# Altium PCB PCB1.PcbDoc (part 2 of 2)
Units mm, origin at the board's own origin, x right, y up, seen from the top; angles counter-clockwise.
Board outline 42.3 x 53.8 mm, 2 copper layers (Top Layer, Bottom Layer), stack 1.571 mm thick; 73 components, 29 nets, 129 pads, 33 vias.
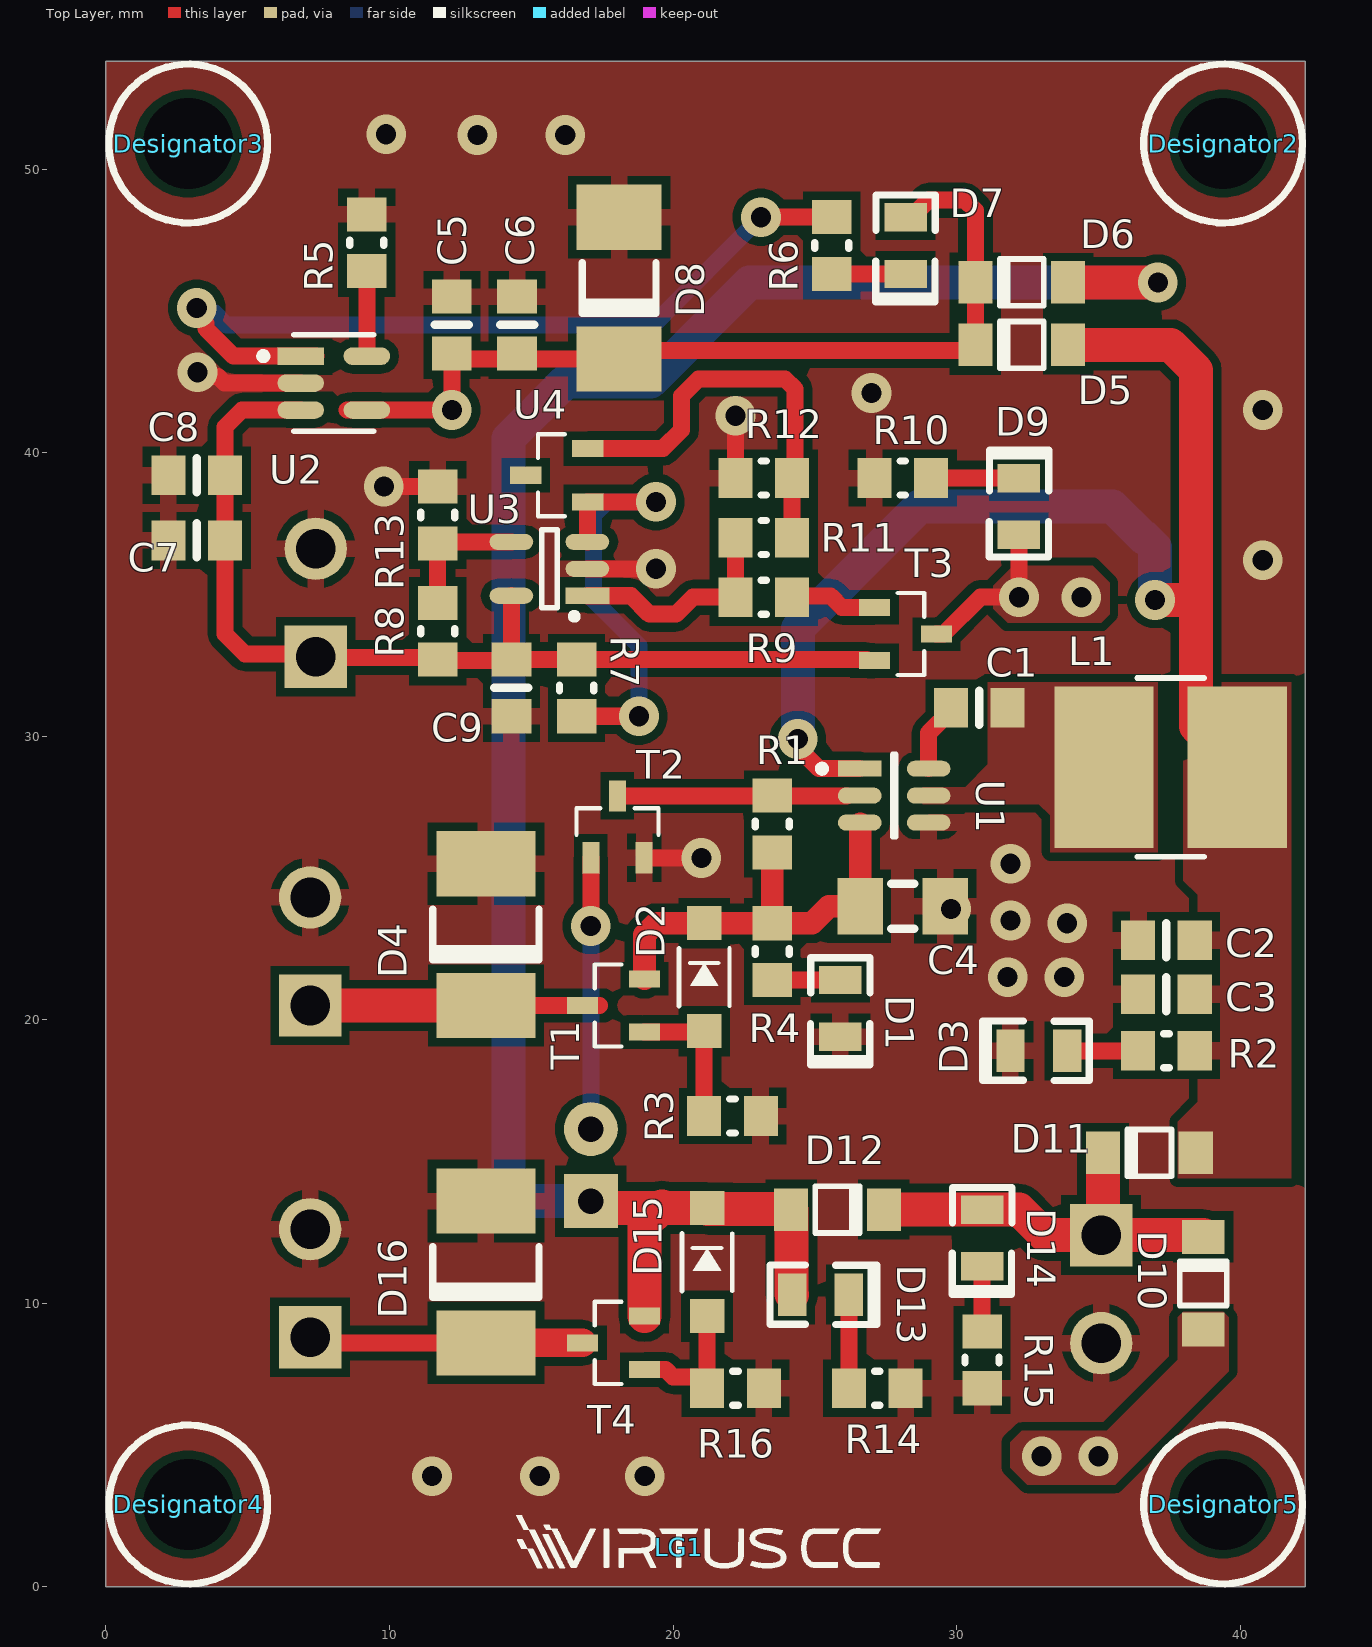
[diagram p0: Top Layer view]

## Part data (continued)
R11: "RES 270K OHM 1% 1/8W 0805", Case Code (Imperial)=0805, Case Code (Metric)=2012, Manufacturer=Yageo, Max Operating Temperature=155°C, Max Power Dissipation=125mW, Min Operating Temperature=-55°C, Package Quantity=1, Resistance Tolerance=1%, Resistor Type="Thick Film", Supplier Part Number=311-270KCRCT-ND, Temperature Coefficient=100ppm/°C, Voltage Rating=150V, Case/Package=0805, Category="Chip SMD Resistors", ComponentLink1Description=https://datasheet.ciiva.com/11819/0900766b8106beab-11819833.pdf?src-supplier=Rs, ComponentLink1URL=https://datasheet.ciiva.com/11819/0900766b8106beab-11819833.pdf?src-supplier=Rs, ComponentLink2Description=https://datasheet.ciiva.com/2457/pyu-r-int-thick-7-2457227.pdf?src-supplier=Digikey, ComponentLink2URL=https://datasheet.ciiva.com/2457/pyu-r-int-thick-7-2457227.pdf?src-supplier=Digikey, ComponentLink3Description=https://datasheet.ciiva.com/2457/pyu-r-int-thick-7-2457228.pdf?src-supplier=Digikey, ComponentLink3URL=https://datasheet.ciiva.com/2457/pyu-r-int-thick-7-2457228.pdf?src-supplier=Digikey, ComponentLink4Description=https://datasheet.ciiva.com/2457/pyu-r-int-thick-7-2457229.pdf?src-supplier=Digikey, ComponentLink4URL=https://datasheet.ciiva.com/2457/pyu-r-int-thick-7-2457229.pdf?src-supplier=Digikey, ComponentLink5Description=https://datasheet.ciiva.com/5558/rc0805-5558095.pdf?src-supplier=Mouser, ComponentLink5URL=https://datasheet.ciiva.com/5558/rc0805-5558095.pdf?src-supplier=Mouser, Depth=1.25mm, Features="Moisture Resistant", Height=0.024inch, Lead Free="Lead Free", Length=0.079inch, Manufacturer Part Number=RC0805FR-07270KL, Number of Terminations=2, Packaging="Cut Tape", Power Rating=125mW, Pricing="1=0,1, 10=0,025, 50=0,016, 100=0,0133, 500=0,00912, 1000=0,00787 (USD)", Reach SVHC Compliant=Unknown, RoHS=Yes, RoHS Compliant=Yes, Series=RC, Stock=171412, Supplier=Digikey, Supplier 1=Digikey, Supplier 2=Mouser, Supplier Part Number 1=311-270KCRCT-ND, Supplier Part Number 2=603-RC0805FR-07270KL, Technology="THICK FILM", Termination=SMD/SMT, Tolerance=1%, Voltage Rating (AC)=150V, Width=0.049inch, Working Voltage=150V
R12: "RES 16K OHM 1% 1/8W 0805", Case Code (Imperial)=0805, Case Code (Metric)=2012, Manufacturer=Yageo, Max Operating Temperature=155°C, Max Power Dissipation=125mW, Min Operating Temperature=-55°C, Package Quantity=1, Supplier Part Number=311-16.0KCRCT-ND, Temperature Coefficient=100ppm/°C, Tolerance=1%, Voltage Rating=150V, Case/Package=0805, Category="Chip SMD Resistors", ComponentLink1Description=https://datasheet.ciiva.com/2457/pyu-r-int-thick-7-2457554.pdf?src-supplier=Digikey, ComponentLink1URL=https://datasheet.ciiva.com/2457/pyu-r-int-thick-7-2457554.pdf?src-supplier=Digikey, ComponentLink2Description=https://datasheet.ciiva.com/2457/pyu-r-int-thick-7-2457555.pdf?src-supplier=Digikey, ComponentLink2URL=https://datasheet.ciiva.com/2457/pyu-r-int-thick-7-2457555.pdf?src-supplier=Digikey, ComponentLink3Description=https://datasheet.ciiva.com/2457/pyu-r-int-thick-7-2457556.pdf?src-supplier=Digikey, ComponentLink3URL=https://datasheet.ciiva.com/2457/pyu-r-int-thick-7-2457556.pdf?src-supplier=Digikey, ComponentLink4Description=https://datasheet.ciiva.com/16744/rc0805-16744799.pdf?src-supplier=Future+Electronics, ComponentLink4URL=https://datasheet.ciiva.com/16744/rc0805-16744799.pdf?src-supplier=Future+Electronics, ComponentLink5Description=https://datasheet.ciiva.com/15189/getdatasheetpartid-327975-15189909.pdf?src-supplier=Verical, ComponentLink5URL=https://datasheet.ciiva.com/15189/getdatasheetpartid-327975-15189909.pdf?src-supplier=Verical, Construction=Rectangular, Depth=1.25mm, Features="Moisture Resistant", Height=0.024inch, Lead Free="Lead Free", Length=0.079inch, Manufacturer Part Number=RC0805FR-0716KL, Military Standard=Not, Number of Terminations=2, Packaging="Tape and Reel", Power Rating=125mW, Pricing="1=0,1, 10=0,026, 50=0,0162, 100=0,0136, 500=0,00932, 1000=0,00805 (USD)", RoHS=Yes, RoHS Compliant=Yes, Series=RC, Stock=164068, Supplier=Digikey, Supplier 1=Digikey, Supplier 2=Mouser, Supplier Part Number 1=311-16.0KCRCT-ND, Supplier Part Number 2=603-RC0805FR-0716KL, Termination=SMD/SMT, Voltage Rating (DC)=150V, Width=0.049inch
R13: "RES 330K OHM 1% 1/8W 0805", Case Code (Imperial)=0805, Case Code (Metric)=2012, Manufacturer=Yageo, Max Operating Temperature=155°C, Min Operating Temperature=-55°C, Power Rating=125mW, Supplier Part Number=13-RC0805FR-13330KLCT-ND, Temperature Coefficient=100ppm/°C, Tolerance=1%, Voltage Rating=150V, Case/Package=0805, Category="Chip SMD Resistors", ComponentLink1Description=http://www.mouser.com/ds/2/447/Yageo_08112016_RC0805-968729.pdf?src-supplier=Mouser, ComponentLink1URL=http://www.mouser.com/ds/2/447/Yageo_08112016_RC0805-968729.pdf?src-supplier=Mouser, ComponentLink2Description=http://www.yageo.com/documents/recent/PYu-RC_Group_51_RoHS_L_2.pdf?src-supplier=Avnet, ComponentLink2URL=http://www.yageo.com/documents/recent/PYu-RC_Group_51_RoHS_L_2.pdf?src-supplier=Avnet, ComponentLink3Description=https://datasheet.octopart.com/RC0805FR-13330KL-Yageo-datasheet-164759695.pdf?src-supplier=Future+Electronics, ComponentLink3URL=https://datasheet.octopart.com/RC0805FR-13330KL-Yageo-datasheet-164759695.pdf?src-supplier=Future+Electronics, Contact Plating=Tin,Matte, Height=0.5mm, Length=2mm, Manufacturer Part Number=RC0805FR-13330KL, Packaging="Tape and Reel", Pricing="1=0,1, 10=0,025, 50=0,016, 100=0,0133, 500=0,00912, 1000=0,00787, 5000=0,00577, 10000=0,00511 (USD)", RoHS=Yes, RoHS Compliant=Yes, Series=RC, Stock=27015, Supplier=Digikey, Supplier 1=Digikey, Supplier 2=Mouser, Supplier Part Number 1=13-RC0805FR-13330KLCT-ND, Supplier Part Number 2=603-RC0805FR-13330KL, Termination=SMD/SMT, Width=1.25mm
STF1 STF2 STF3 STF4: "HEX STANDOFF M3x0.5 BRASS 15MM"
T1 T4: "MOSFET P-CH 40V 2.4A SOT23", Case/Package=SOT-23, Continuous Drain Current (ID)=2.4A, Drain to Source Breakdown Voltage=-40V, Drain to Source Resistance=64mR, Drain to Source Voltage (Vdss)=40V, Gate to Source Voltage (Vgs)=20V, Input Capacitance=587pF, Manufacturer=Diodes, Max Operating Temperature=150°C, Max Power Dissipation=720mW, Min Operating Temperature=-55°C, Supplier Part Number=DMP4065S-7DICT-ND, Category=MOSFETs, ComponentLink1Description=http://www.farnell.com/datasheets/2649034.pdf?src-supplier=Farnell, ComponentLink1URL=http://www.farnell.com/datasheets/2649034.pdf?src-supplier=Farnell, ComponentLink2Description=http://www.mouser.com/ds/2/115/DMP4065S-537770.pdf?src-supplier=Mouser, ComponentLink2URL=http://www.mouser.com/ds/2/115/DMP4065S-537770.pdf?src-supplier=Mouser, ComponentLink3Description=https://www.diodes.com/assets/Datasheets/DMP4065S.pdf?src-supplier=Digikey, ComponentLink3URL=https://www.diodes.com/assets/Datasheets/DMP4065S.pdf?src-supplier=Digikey, ComponentLink4Description=http://diodes.com/datasheets/DMP4065S.pdf?src-supplier=Avnet, ComponentLink4URL=http://diodes.com/datasheets/DMP4065S.pdf?src-supplier=Avnet, ComponentLink5Description=http://www.farnell.com/datasheets/2649034.pdf?src-supplier=Newark, ComponentLink5URL=http://www.farnell.com/datasheets/2649034.pdf?src-supplier=Newark, ComponentLink6Description=http://www.farnell.com/datasheets/2649034.pdf?src-supplier=Element14, ComponentLink6URL=http://www.farnell.com/datasheets/2649034.pdf?src-supplier=Element14, ComponentLink7Description=https://datasheet.octopart.com/DMP4065S-7-Diodes-Inc.-datasheet-129886328.pdf?src-supplier=TME, ComponentLink7URL=https://datasheet.octopart.com/DMP4065S-7-Diodes-Inc.-datasheet-129886328.pdf?src-supplier=TME, Height=1.1mm, Manufacturer Part Number=DMP4065S-7, Mounting Technology="Surface Mount", Number of Channels=1, Packaging="Cut Tape", Pins=3, Power Dissipation=720mW, Pricing="1=0,43, 10=0,302, 100=0,1523, 500=0,135, 1000=0,10506 (USD)", Rds On Max=80mR, RoHS=Yes, RoHS Compliant=Yes, Series=-, Stock=25010, Supplier=Digikey, Supplier 1=Digikey, Supplier 2=Mouser, Supplier Part Number 1=DMP4065S-7DICT-ND, Supplier Part Number 2=621-DMP4065S-7, Turn-Off Delay Time=36.3ns, Turn-On Delay Time=3.6ns
T2: "TRANS PREBIAS NPN 200MW SOT23-3", Case/Package=SOT-23-3, Collector Emitter Breakdown Voltage=50V, Collector-emitter Voltage-Max=300mV, Continuous Collector Current=100mA, Emitter Base Voltage (VEBO)=30V, JLCPCB Part=C508183, Manufacturer=Diodes, Max Operating Temperature=150°C, Max Power Dissipation=200mW, Min Operating Temperature=-55°C, Package Quantity=3000, Supplier Part Number 1=DDTC143ZCA-FDICT-ND, Transition Frequency=250MHz, Category=BJTs, Collector Emitter Voltage (VCEO)=50V, ComponentLink1Description=http://www.mouser.com/ds/2/115/ds30330-71322.pdf?src-supplier=Mouser, ComponentLink1URL=http://www.mouser.com/ds/2/115/ds30330-71322.pdf?src-supplier=Mouser, ComponentLink2Description=http://www.alliedelec.com/m/d/be0b5f6f3c5081911d08f51c92d34358.pdf?src-supplier=Allied+Electronics, ComponentLink2URL=http://www.alliedelec.com/m/d/be0b5f6f3c5081911d08f51c92d34358.pdf?src-supplier=Allied+Electronics, ComponentLink3Description=http://uk.rs-online.com/webdocs/1321/0900766b81321d3c.pdf?src-supplier=RSComponents, ComponentLink3URL=http://uk.rs-online.com/webdocs/1321/0900766b81321d3c.pdf?src-supplier=RSComponents, ComponentLink4Description=http://components.arrow.com/part/dataview/41508542S9348013N2867?src-supplier=Arrow+Electronics, ComponentLink4URL=http://components.arrow.com/part/dataview/41508542S9348013N2867?src-supplier=Arrow+Electronics, ComponentLink5Description=http://www.diodes.com//datasheets/ds30330.pdf?src-supplier=Avnet, ComponentLink5URL=http://www.diodes.com//datasheets/ds30330.pdf?src-supplier=Avnet, ComponentLink6Description=http://www.diodes.com/_files/datasheets/ds30330.pdf?src-supplier=Future+Electronics, ComponentLink6URL=http://www.diodes.com/_files/datasheets/ds30330.pdf?src-supplier=Future+Electronics, ComponentLink7Description=https://www.diodes.com/assets/Datasheets/ds30330.pdf?src-supplier=Digi-Key, ComponentLink7URL=https://www.diodes.com/assets/Datasheets/ds30330.pdf?src-supplier=Digi-Key, Current Rating=100mA, Element Configuration=Single, Height=1mm, hFE Min=80, Lead Free="Lead Free", Length=3.05mm, Manufacturer Part Number=DDTC143ZCA-7-F, Max Breakdown Voltage=50V, Max Collector Current=100mA, Max Output Current=100mA, Mount="Surface Mount", Number of Pins=3, Operating Supply Voltage=50V, Packaging="Tape and Reel", Polarity=NPN, Pricing 1="1=0,20000, 10=0,18400, 100=0,10000, 500=0,06156, 1000=0,04198 (USD)", Radiation Hardening=No, RoHS=Yes, RoHS Compliant=Yes, Series=-, Stock 1=1278422, Supplier 1=Digi-Key, Supplier 2=Mouser, Supplier 3="Arrow Electronics", Supplier 4=Digi-Key, Supplier 5=Mouser, Supplier 6=Digi-Key, Supplier 7=Mouser, Supplier Part Number 2=621-DDTC143ZCA-F, Supplier Part Number 3=DDTC143ZCA-7-F, Supplier Part Number 4=1727-3045-1-ND, Supplier Part Number 5=771-PDTC143ZT-/T3, Supplier Part Number 6=MUN2233T1GOSCT-ND, Supplier Part Number 7=863-MUN2233T1G, Voltage Rating (DC)=50V, Weight=0.000282oz, Width=1.4mm
T3: "MOSFET P-CHANNEL 20V 4A SOT23", JLCPCB Part=C391636, Manufacturer="Pan Jit", Supplier Part Number 1=3757-PJA3415_R1_00001CT-ND, Manufacturer Part Number=PJA3415_R1_00001, Pricing 1="1=0,40000, 10=0,30100, 100=0,17040, 500=0,11286, 1000=0,08653 (USD)", RoHS=Yes, RoHS Compliant=Yes, Stock 1=8995, Supplier 1=Digikey, Supplier 2=Mouser, Supplier Part Number 2=241-PJA3415_R1_00001
U1: "IC REG BUCK 5V 2A TSOT23-6", Manufacturer=Diodes, Max Operating Temperature=85°C, Max Supply Voltage=32V, Min Operating Temperature=-40°C, Min Supply Voltage=3.8V, Nominal Supply Current=22uA, Output Current=2A, Output Voltage=5V, Supplier Part Number=AP63205WU-7DICT-ND, Switching Frequency=1.1MHz, Category="Voltage Regulators - Switching", ComponentLink1Description=https://www.diodes.com/assets/Datasheets/AP63200-AP63201-AP63203-AP63205.pdf?src-supplier=Digikey, ComponentLink1URL=https://www.diodes.com/assets/Datasheets/AP63200-AP63201-AP63203-AP63205.pdf?src-supplier=Digikey, Height=1mm, Manufacturer Part Number=AP63205WU-7, Max Duty Cycle=100%, Number of Outputs=1, Pricing="1=0,71, 10=0,506, 25=0,4548, 100=0,398, 250=0,37088, 500=0,35456, 1000=0,34112 (USD)", RoHS=Yes, Stock=22325, Supplier=Digikey, Supplier 1=Digikey, Supplier 2=Mouser, Supplier Part Number 1=AP63205WU-7DICT-ND, Supplier Part Number 2=621-AP63205WU-7
U2: "IC BATT CNTL LI-ION 1CEL SOT23-5", Battery Pack Voltage=4.2V, Case/Package=SOT-23, Drain to Source Resistance=350mR, Manufacturer=Microchip, Max Charge Current=500mA, Max Operating Temperature=85°C, Max Output Voltage=4.5V, Max Power Dissipation=1.54W, Max Supply Voltage=6V, Min Operating Temperature=-40°C, Min Output Voltage=4.168V, Min Supply Voltage=3.75V, Supplier Part Number=MCP73831T-2ACI/OTCT-ND, Voltage Rating=4.534V, Category="Battery Management", ComponentLink1Description=https://datasheet.ciiva.com/22828/0900766b80d2b53a-22828876.pdf?src-supplier=Rs, ComponentLink1URL=https://datasheet.ciiva.com/22828/0900766b80d2b53a-22828876.pdf?src-supplier=Rs, ComponentLink2Description=https://datasheet.ciiva.com/26344/651521-da-01-en-contr-mcp73831t-2aci-ot-sot-23-5-mcp-26344458.pdf?src-supplier=Conrad, ComponentLink2URL=https://datasheet.ciiva.com/26344/651521-da-01-en-contr-mcp73831t-2aci-ot-sot-23-5-mcp-26344458.pdf?src-supplier=Conrad, ComponentLink3Description=https://datasheet.ciiva.com/1931/21984e-1931953.pdf?src-supplier=Digikey, ComponentLink3URL=https://datasheet.ciiva.com/1931/21984e-1931953.pdf?src-supplier=Digikey, ComponentLink4Description=https://datasheet.ciiva.com/1931/21984e-1931954.pdf?src-supplier=Digikey, ComponentLink4URL=https://datasheet.ciiva.com/1931/21984e-1931954.pdf?src-supplier=Digikey, ComponentLink5Description=https://datasheet.ciiva.com/1931/21984e-1931955.pdf?src-supplier=Digikey, ComponentLink5URL=https://datasheet.ciiva.com/1931/21984e-1931955.pdf?src-supplier=Digikey, ComponentLink6Description=https://datasheet.ciiva.com/3213/21984e-3213404.pdf?src-supplier=Avnet, ComponentLink6URL=https://datasheet.ciiva.com/3213/21984e-3213404.pdf?src-supplier=Avnet, ComponentLink7Description=https://datasheet.ciiva.com/28626/630369-28626439.pdf?src-supplier=Element14, ComponentLink7URL=https://datasheet.ciiva.com/28626/630369-28626439.pdf?src-supplier=Element14, ComponentLink8Description=https://datasheet.ciiva.com/46385/630369-46385324.pdf?src-supplier=Element14, ComponentLink8URL=https://datasheet.ciiva.com/46385/630369-46385324.pdf?src-supplier=Element14, ComponentLink9Description=https://datasheet.ciiva.com/1137/630369-1137803.pdf?src-supplier=Element14, ComponentLink9URL=https://datasheet.ciiva.com/1137/630369-1137803.pdf?src-supplier=Element14, ComponentLink10Description=https://datasheet.ciiva.com/1144/630369-1144461.pdf?src-supplier=Newark, ComponentLink10URL=https://datasheet.ciiva.com/1144/630369-1144461.pdf?src-supplier=Newark, ComponentLink11Description=https://datasheet.ciiva.com/16286/filehandler-aspxddocname-en025112-16286957.pdf?src-supplier=Future+Electronics, ComponentLink11URL=https://datasheet.ciiva.com/16286/filehandler-aspxddocname-en025112-16286957.pdf?src-supplier=Future+Electronics, Fault Protection="Over Voltage", Height=1.3mm, Length=3.1mm, Manufacturer Part Number=MCP73831T-2ACI/OT, Mounting Technology="Surface Mount", Number of Cells=1, Number of Channels=1, Number of Outputs=1, Output Current=500mA, Output Voltage=4.2V, Packaging="Tape and Reel", Pins=5, Pricing="1=0,76, 25=0,63, 100=0,6125 (USD)", Radiation Hardening=No, Reach SVHC Compliant=No, RoHS=Yes, RoHS Compliant=Yes, Series=-, Stock=33781, Supplier=Digikey, Supplier 1=Digikey, Supplier 2=Mouser, Supplier Part Number 1=MCP73831T-2ACI/OTCT-ND, Supplier Part Number 2=579-MCP73831T-2ACIOT, Termination=SMD/SMT, Weight=0.00709oz, Width=1.8mm
U3: "AUTOMOTIVE NANO POWER COMPARATOR", JLCPCB Part=C3658921, Manufacturer="Texas Instruments", Supplier Part Number 1=296-TLV7031QDBVRQ1CT-ND, Manufacturer Part Number=TLV7031QDBVRQ1, Pricing 1="1=0,96000, 10=0,86000, 25=0,81600, 100=0,67040, 250=0,62672, 500=0,55384, 1000=0,48125 (USD)", RoHS=No, RoHS Compliant=Yes, Stock 1=2000, Supplier 1=Digi-Key, Supplier 2=Mouser, Supplier Part Number 2=595-TLV7031QDBVRQ1
U4: "IC VREF SHUNT 1% SOT23-3", Case/Package=TO-236-3, Cathode Current=70uA, Manufacturer=Microchip, Max Operating Temperature=85°C, Min Operating Temperature=-40°C, Min Output Voltage=1.225V, Output Current=12mA, Supplier Part Number 1=576-2572-1-ND, Temperature Coefficient=150ppm/°C, Tolerance=1%, Category="Voltage References", ComponentLink1Description=https://datasheet.ciiva.com/16221/lm4040-16221709.pdf?src-supplier=Future+Electronics, ComponentLink1URL=https://datasheet.ciiva.com/16221/lm4040-16221709.pdf?src-supplier=Future+Electronics, Manufacturer Part Number=LM4041DYM3-1.2-TR, Mount="Surface Mount", Output Type=Fixed, Packaging="Tape and Reel", Pricing 1="1=0,36000, 25=0,30760, 100=0,27560 (USD)", Reference Type=Shunt, RoHS=Yes, Stock 1=2876, Supplier 1=Digi-Key, Supplier 2=Mouser, Supplier Part Number 2=998-LM4041DYM3-1.2TR

## Via types
v1: diameter 1.4, hole 0.711, Top Layer to Bottom Layer, tented both sides, 33 vias

## Nets (pads, with @x,y where several pads share a name; then routed paths per layer and width w, separated by ;. In a path a pad name is that pad's centre, name@x,y a point inside that pad or via, vN(x,y) a via of type N, cw(c..) or ccw(c..) an arc to the next point about the centre after c; other vN are vias at no path point)
+3.7V: D9.2 D10.2 T3.3 | length 5.6
  Top Layer w0.6: T3.3 29.542,33.6 30.842,34.9 v1(32.2,34.9) D9.2
  other v1: 33,4.6 35,4.6 34.4,34.9
+5V_Ext: C2.1 C3.1 D5.2 D11.2 L1.2 R2.2 U1.1 | length 44.5
  Top Layer w0.6: v1(24.4,29.9) 24.553,29.747 24.553,29.448 25.151,28.85 U1.1
  Top Layer w1.2: D5.2 37.549,43.8 38.45,42.899 38.45,34.8 ; v1(37,34.8) 38.45,34.8 ; L1.2 38.45,30.35 38.45,34.8
  Bottom Layer w1.2: v1(24.4,29.9) 24.4,33.8 28.7,38.1 35.5,38.1 36.6,37 36.649,37 37,36.649 v1(37,34.8)
+5V_USB: CONN1.1 D6.2 D12.2 D13.2 D15.1 T4.2 | length 72.1
  Top Layer w1.2: CONN1.1 17.35,13.35 19.55,13.35 ; T4.2 18.992,12.792 19.55,13.35 ; 19.605,13.405 19.55,13.35 ; D13.2 24.183,10.317 24.183,13.282 D12.2 24.14,13.325 21.225,13.325 D15.1 19.55,13.35 ; D6.2 v1(37.1,46)
  Bottom Layer w1.2: CONN1.1 14.903,13.6 14.2,14.303 14.2,40.5 16.2,42.5 19.2,42.5 22.7,46 v1(37.1,46)
GND: C2.2 C3.2 C4.2 C5.2 C6.2 C7.2 C8.2 C9.2 D1.1 D3.1 D4.2 D8.2 D16.2 J2.2 J3.2 J6.2 J7.2 R3.1 R5.1 R10.2 R12.1 R13.1 R14.1 R15.1 R16.1 T2.2 U1.4 U2.2 U3.2 | length 12.4
  Top Layer w0.6: v1(3.231,42.831) 3.384,42.678 3.95,42.678 4.177,42.45 U2.2 ; v1(9.8,38.8) R13.1 ; U3.2 v1(19.4,35.9) ; T2.2 18.98,25.7 v1(21,25.7) ; R12.1 v1(22.2,41.3) ; R16.1@23.4,6.74 R16.1@23.4,6.84
  other v1: 11.5,3.9 15.3,3.9 19,3.9 31.8,21.5 33.8,21.5 33.9,23.4 31.9,23.5 29.8,23.9 31.9,25.5 40.8,36.2 40.8,41.5 27,42.1 13.1,51.2 16.2,51.2 9.88,51.225
NetC1_1: C1.1 U1.6 | length 2.5
  Top Layer w0.6: U1.6 29.016,30.116 29.8,30.9 C1.1
NetC1_2: C1.2 L1.1 U1.5
NetC4_1: C4.1 D2.1 R1.2 R4.2 T1.2 U1.3 | length 14.6
  Top Layer w0.8: T1.2 18.992,22.992 19.405,23.405 D2.1 21.102,23.402 23.498,23.402 R4.2 ; R1.2@23.5,25.5 R4.2 ; U1.3@26.6,26.9 C4.1 25.5,24 24.9,23.4 R4.2
NetC5_1: C5.1 C6.1 D5.1 D6.1 D7.2 D8.1 U2.4 | length 31.8
  Top Layer w0.6: U2.4@8.51,41.5 U2.4 v1(12.2,41.5) 12.2,43.3 D8.1 18.4,43.6 30.465,43.6 D5.1 D6.1 30.665,48.535 30.3,48.9 29.001,48.9 28.65,48.549 28.65,48.5 28.45,48.3 D7.2
NetCONN1_2: CONN1.2 T2.1 | length 9.6
  Top Layer w0.6: v1(17.1,23.3) T2.1
  Bottom Layer w0.6: CONN1.2 v1(17.1,23.3)
NetD1_2: D1.2 R4.1 | length 2.4
  Top Layer w0.6: R4.1 D1.2
NetD2_2: D2.2 R3.2 T1.1 | length 5.1
  Top Layer w0.6: T1.1 21.065,19.56 D2.2 R3.2
NetD3_2: D3.2 R2.1 | length 2.5
  Top Layer w0.6: D3.2 R2.1
NetD7_1: D7.1 R6.2 | length 2.6
  Top Layer w0.6: R6.2 D7.1
NetD9_1: D9.1 R10.1 | length 3.1
  Top Layer w0.6: R10.1 D9.1
NetD13_1: D13.1 R14.2 | length 3.3
  Top Layer w0.6: R14.2 D13.1
NetD14_1: D14.1 R15.2 | length 2.3
  Top Layer w0.6: R15.2 D14.1
NetD15_2: D15.2 R16.2 T4.1 | length 5.1
  Top Layer w0.6: T4.1 19.74,7.66 20,7.4 20.9,7.4 21.2,7.1 R16.2 D15.2
NetR1_1: R1.1 T2.3 U1.2 | length 8
  Top Layer w0.6: T2.3 R1.1@23.492,27.892 ; R1.1@23.517,27.883 U1.2@26.115,27.883
NetR5_2: R5.2 U2.5 | length 3
  Top Layer w0.6: U2.5 R5.2
NetR6_1: R6.1 U2.1 | length 29.4
  Top Layer w0.6: v1(3.2,45.1) 3.2,44.884 3.531,44.552 3.531,44.369 4.5,43.4 U2.1 U2.1@7.4,43.4 ; v1(23.1,48.3) R6.1
  Bottom Layer w0.6: v1(3.2,45.1) 3.353,44.947 3.805,44.947 4.251,44.5 19.3,44.5 v1@23.103,48.303
NetR7_2: R7.2 U3.3 U4.1 | length 16.2
  Top Layer w0.6: R7.2 v1(18.8,30.7) ; U3.3 16.987,36.856 16.987,38.26 U4.1 v1(19.4,38.26)
  Bottom Layer w0.6: v1(18.8,30.7) 18.8,33.2 17.2,34.8 17.2,37.8 17.66,38.26 v1(19.4,38.26)
NetR8_1: R8.1 R13.2 U3.4 | length 4.7
  Top Layer w0.6: R8.1 R13.2 11.75,36.85 U3.4
NetR9_1: R9.1 R11.2 U3.1 | length 7.9
  Top Layer w0.6: U3.1 18.512,34.95 19.162,34.3 20.1,34.3 20.7,34.9 R9.1@22.3,34.9 ; R9.1 R11.2
NetR9_2: R9.2 T3.1 | length 3
  Top Layer w0.6: R9.2@24.3,34.9 24.34,34.94 25.56,34.94 25.96,34.54 T3.1
NetR11_1: R11.1 R12.2 U4.2 | length 14.5
  Top Layer w0.6: U4.2 19.64,40.14 20.3,40.8 20.3,42 20.9,42.6 23.949,42.6 24.3,42.249 24.3,39.2 R12.2 R11.1
V_Battery: C7.1 C8.1 C9.1 J3.1 R7.1 R8.2 T3.2 U2.3 U3.5 | length 35.7
  Top Layer w0.6: U2.3 4.8,41.5 4.2,40.9 C8.1 C7.1 4.2,33.6 4.9,32.9 7.3,32.9 J3.1 ; J3.1@7.429,32.771 11.629,32.771 R8.2 ; R8.2@11.729,32.671 C9.1@14.271,32.671 ; U3.5 C9.1 R7.1 26.818,32.7 26.858,32.66 T3.2
VBUS: D16.1 J6.1 T4.3 | length 9.7
  Top Layer w0.6: J6.1@7.1,8.6 D16.1
  Top Layer w1: D16.1 T4.3
VCC: D4.1 J2.1 T1.3 | length 10.2
  Top Layer w0.6: D4.1 17.408,20.5
  Top Layer w1.2: J2.1 D4.1
VSYS: D10.1 D11.1 D12.1 D14.2 J7.1 | length 14.6
  Top Layer w1.2: D12.1 D14.2 32.2,13.3 33.1,12.4 J7.1 ; D11.1 35.165,12.465 J7.1 ; D10.1@38.7,12.4 J7.1
pads on no net: Designator2.1 Designator3.1 Designator4.1 Designator5.1 U4.3

## Polygon pours and split planes (outlines as drawn)
GND on Top Layer "GND_L01_P013" (solid, pour order 13): 0,53.8 42.3,53.8 42.3,0 0,0
+5V_Ext on Top Layer "Top Layer-+5V_Ext" (solid, pour order 5): 37.8,14.4 37.8,16.4 38.5,17.1 38.5,24.4 38,24.9 38,31.9 41.8,31.9 41.8,14.4
+3.7V on Top Layer "+3.7V_L01_P010" (solid, pour order 10): 31.9,4.2 31.9,5.1 32.3,5.5 35.3,5.5 37.8,8 37.8,9.5 38,9.7 39.4,9.7 39.6,9.5 39.6,7.6 35.6,3.6 32.5,3.6
+3.7V on Top Layer "Top Layer-+3.7V" (solid, pour order 0): 31.3,34.5 31.8,34 35.1,34 35.4,34.3 35.4,35.4 34.8,36 32,36 31.3,35.3
NetC1_2 on Top Layer "Top Layer-NetC1_2" (solid, pour order 2): 28.8,27.6 28.8,28.2 30.3,28.2 31.1,29 31.1,31.9 37.1,31.9 37.1,25.9 33.3,25.9 33.3,27.2 32.9,27.6
GND on Bottom Layer "GND_L02_P014" (solid, pour order 14): 0,53.8 42.3,53.8 42.3,0 0,0
+3.7V on Bottom Layer "+3.7V_L02_P011" (solid, pour order 11): 26.9,5.7 29,3.6 35.5,3.6 35.9,4 35.9,5 35.4,5.5 29.6,5.5 28.8,6.3 28.8,32.5 30.1,33.8 35.3,33.8 35.7,34.2 35.7,35.5 35.2,36 29,36 26.9,33.9

## Silkscreen, mask and mechanical layers (free items; w line width, h text height)
Bottom Overlay:
  lines w0.2: 9.2,8.6 10.4,8.6 ; 9.3,20.5 10.5,20.5 ; 9.3,32.9 10.5,32.9 ; 9.8,8 9.8,9.2 ; 9.8,12 9.8,13.2 ; 9.9,19.9 9.9,21.1 ; 9.9,23.9 9.9,25.1 ; 9.9,32.3 9.9,33.5 ; 9.9,36.3 9.9,37.5 ; 31.7,12.4 32.9,12.4 ; 32.3,7.8 32.3,9 ; 32.3,11.8 32.3,13
  text "Source_IoT" at 27.146,47.054 h1.2
  text "Bateria" at 12.246,38.246 h1.2 r90
  text "VCC" at 12.546,24.246 h1.2 r90
  text "VBUS" at 12.546,12.946 h1.2 r90
  text "5V" at 14.646,11.746 h1.2 r90
  text "VSYS" at 29.554,8.054 h1.2 r270
Board Shape:
  the board outline again, w0.3
Route Tool Path:
  lines w1: -0.5,0 ccw(c0,0) 0,-0.5 ; -0.5,0 ccw(c0,0) 0,-0.5 ; -0.5,0 -0.5,53.8 ; -0.5,53.8 cw(c0,53.8) 0,54.3 ; -0.5,53.8 cw(c0,53.8) 0,54.3 ; 0,-0.5 42.3,-0.5 ; 0,54.3 42.3,54.3 ; 42.3,-0.5 ccw(c42.3,0) 42.8,0 ; 42.3,-0.5 ccw(c42.3,0) 42.8,0 ; 42.3,54.3 cw(c42.3,53.8) 42.8,53.8 ; 42.3,54.3 cw(c42.3,53.8) 42.8,53.8 ; 42.8,0 42.8,53.8
Mechanical 11:
  lines w0.2: 28.8,27.6 28.8,28.2 ; 28.8,27.6 28.8,28.2 ; 28.8,27.6 28.8,28.2 ; 28.8,27.6 32.9,27.6 33.4,27.1 33.4,26 37,26 37,31.8 31.1,31.8 31.1,29 30.3,28.2 28.8,28.2 ; 31.3,34.5 31.3,35.3 32,36 34.8,36 35.4,35.4 35.4,34.3 35.1,34 31.8,34 31.3,34.5 ; 31.9,4.2 31.9,5.1 32.3,5.5 35.3,5.5 37.8,8 37.8,9 37.8,9.5 38,9.7 39.4,9.7 39.6,9.5 39.6,7.6 35.6,3.6 32.5,3.6 31.9,4.2 ; 37.8,14.4 41.8,14.4 41.8,18.1 41.8,31.9 38,31.9 38,28.6 38,25 38,24.9 38.5,24.4 38.5,17 37.8,16.3 37.8,14.4
Mechanical 12:
  lines w0.2: 26.9,5.7 26.9,33.9 29,36 34.9,36 35.2,36 35.7,35.5 35.7,34.2 35.3,33.8 34.2,33.8 30.1,33.8 28.8,32.5 28.8,10.7 28.8,6.3 29.6,5.5 35.4,5.5 35.9,5 35.9,4 35.5,3.6 29,3.6 26.9,5.7
Dimensions:
  circle w0.254: c2.9,50.9 r1.6
  circle w0.254: c39.4,50.9 r1.6
  circle w0.254: c2.9,2.9 r1.6
  circle w0.254: c39.4,2.9 r1.6
  lines w0.3: 0,0 42.3,0 42.3,53.8 0,53.8 0,0

## Dimensions
2.9,50.9 to 2.9,2.9 on Dimensions
0,53.8 to 2.9,50.9 on Dimensions
39.4,2.9 to 2.9,2.9 on Dimensions
42.3,0 to 39.4,2.9 on Dimensions
2.9,50.9 to 5.5,48.3 on Dimensions
39.4,50.9 to 36.7,48.3 on Dimensions
39.4,2.9 to 36.6,5.6 on Dimensions
2.9,2.9 to 4.667,4.667 on Dimensions
42.3,0 to 42.3,53.8 on Dimensions
42.3,53.8 to 0,53.8 on Dimensions